# Altium PCB PCB1.PcbDoc (part 1 of 2)
Units mil, origin at the board's own origin, x right, y up, seen from the top; angles counter-clockwise.
Board outline 2755.91 x 2755.91 mil, 4 copper layers (Top Layer, Layer 1, Layer 2, Bottom Layer), stack 23.756 mil thick; 63 components, 137 nets, 462 pads, 284 vias.
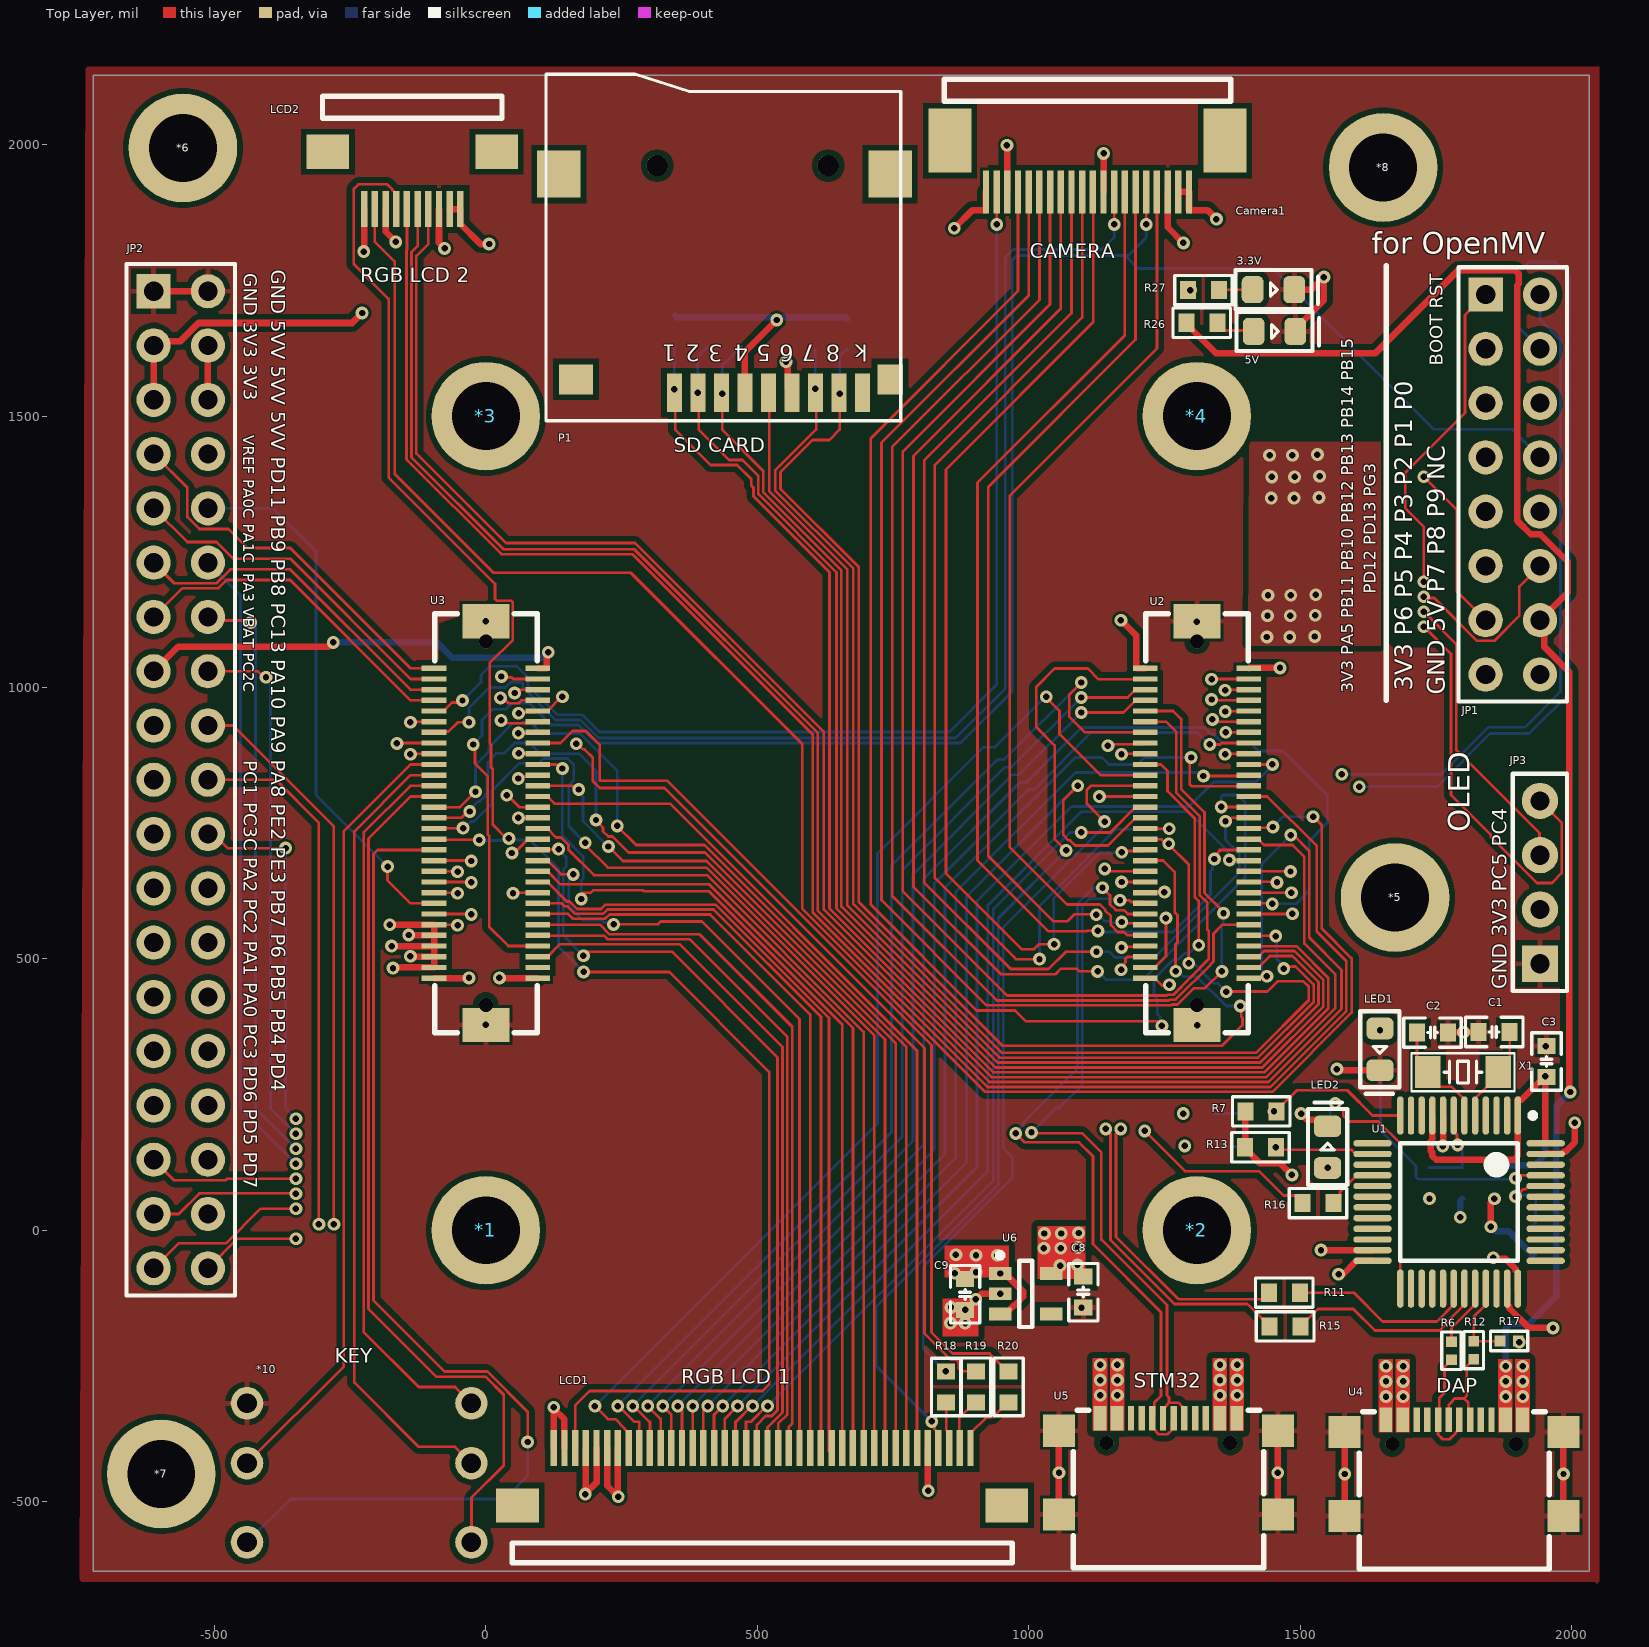
[diagram p0: Top Layer view]
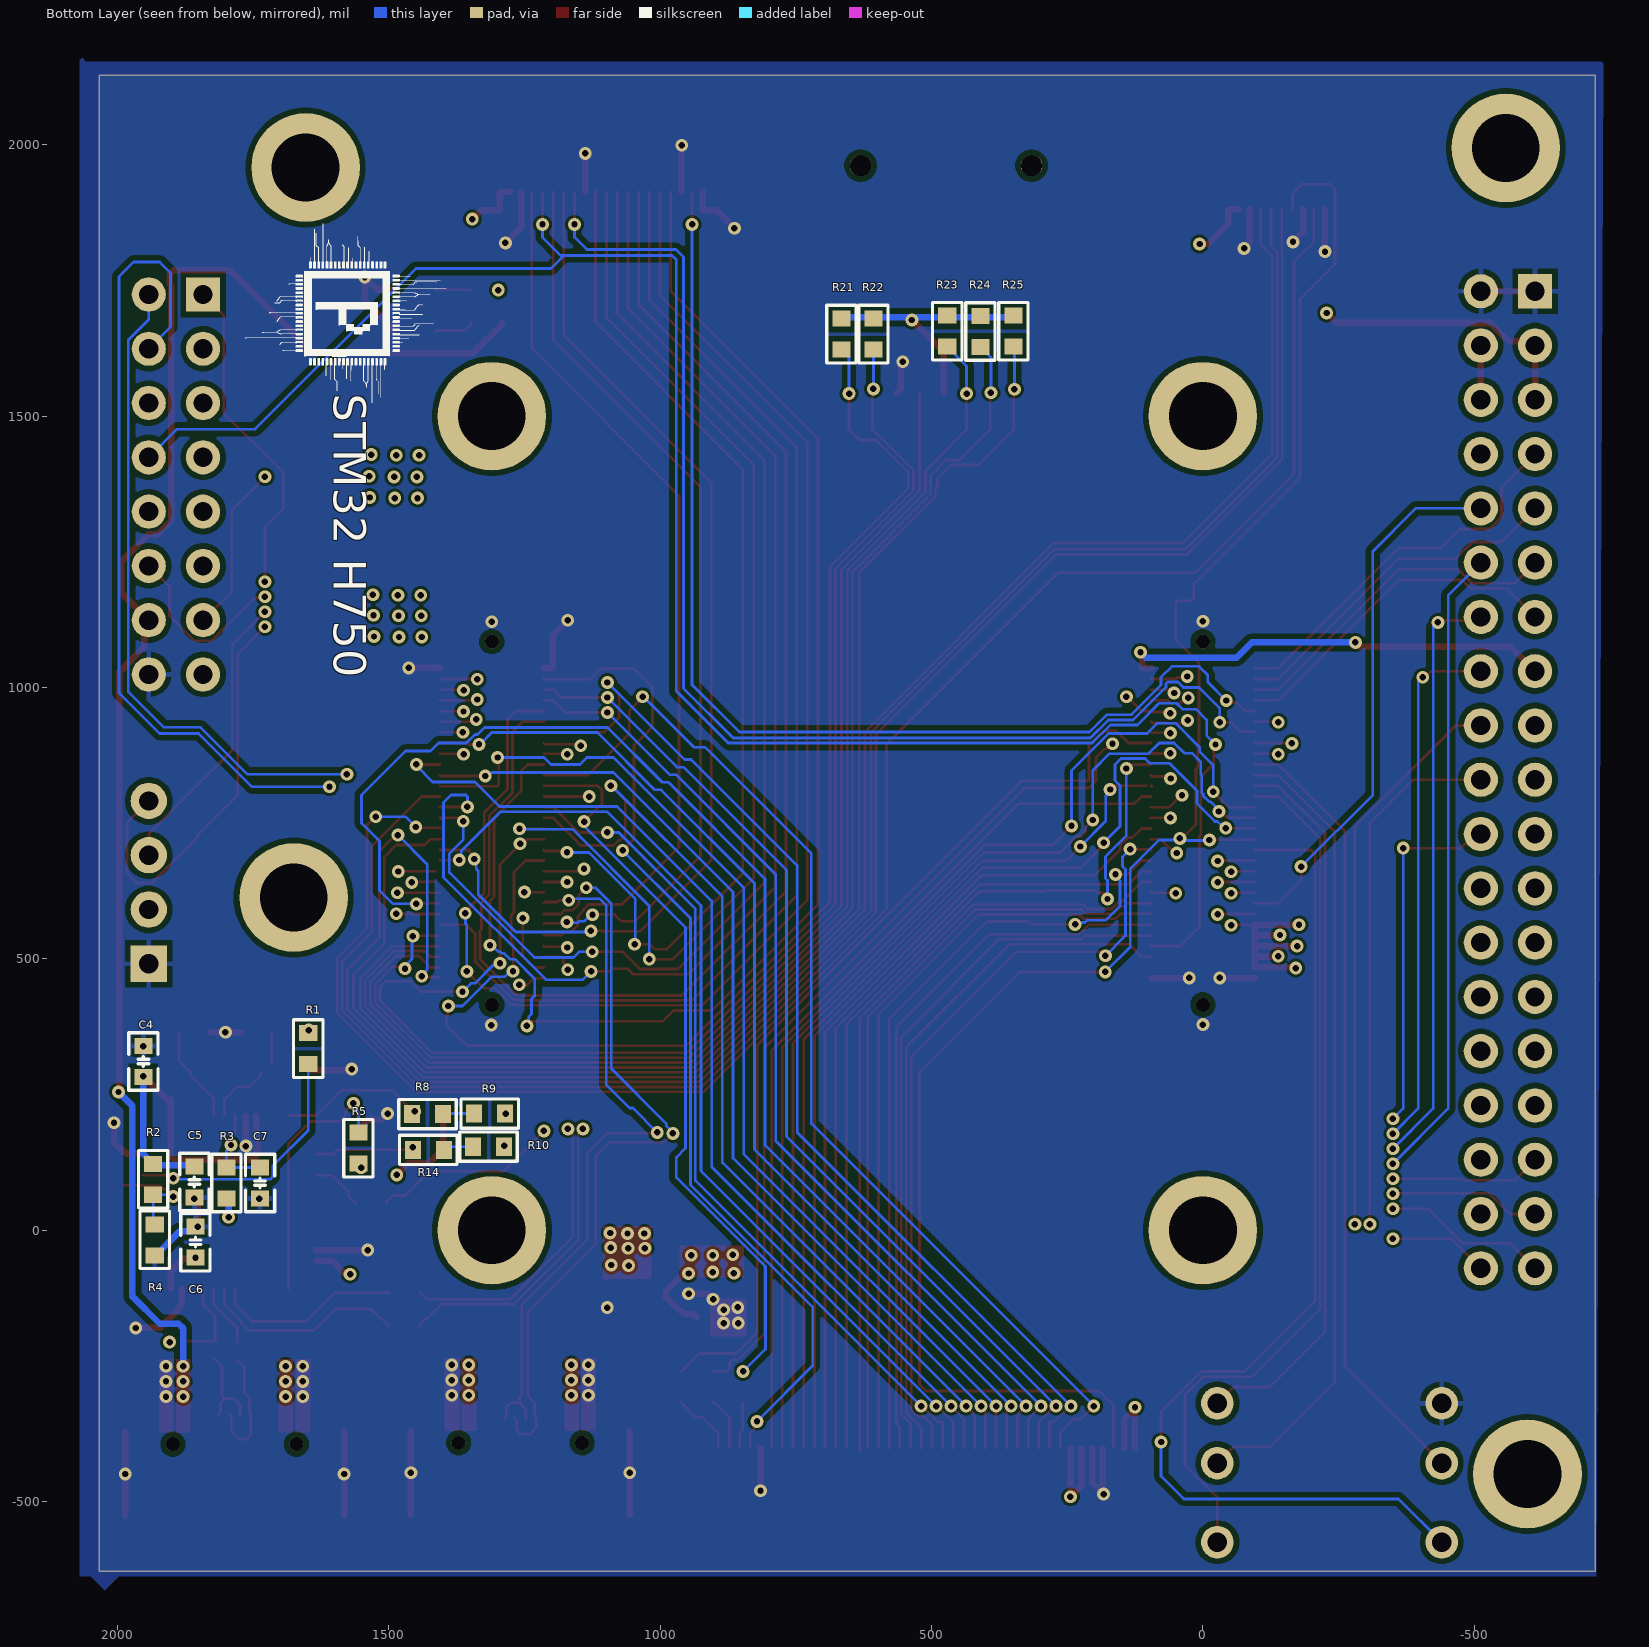
[diagram p1: Bottom Layer view, seen from below]
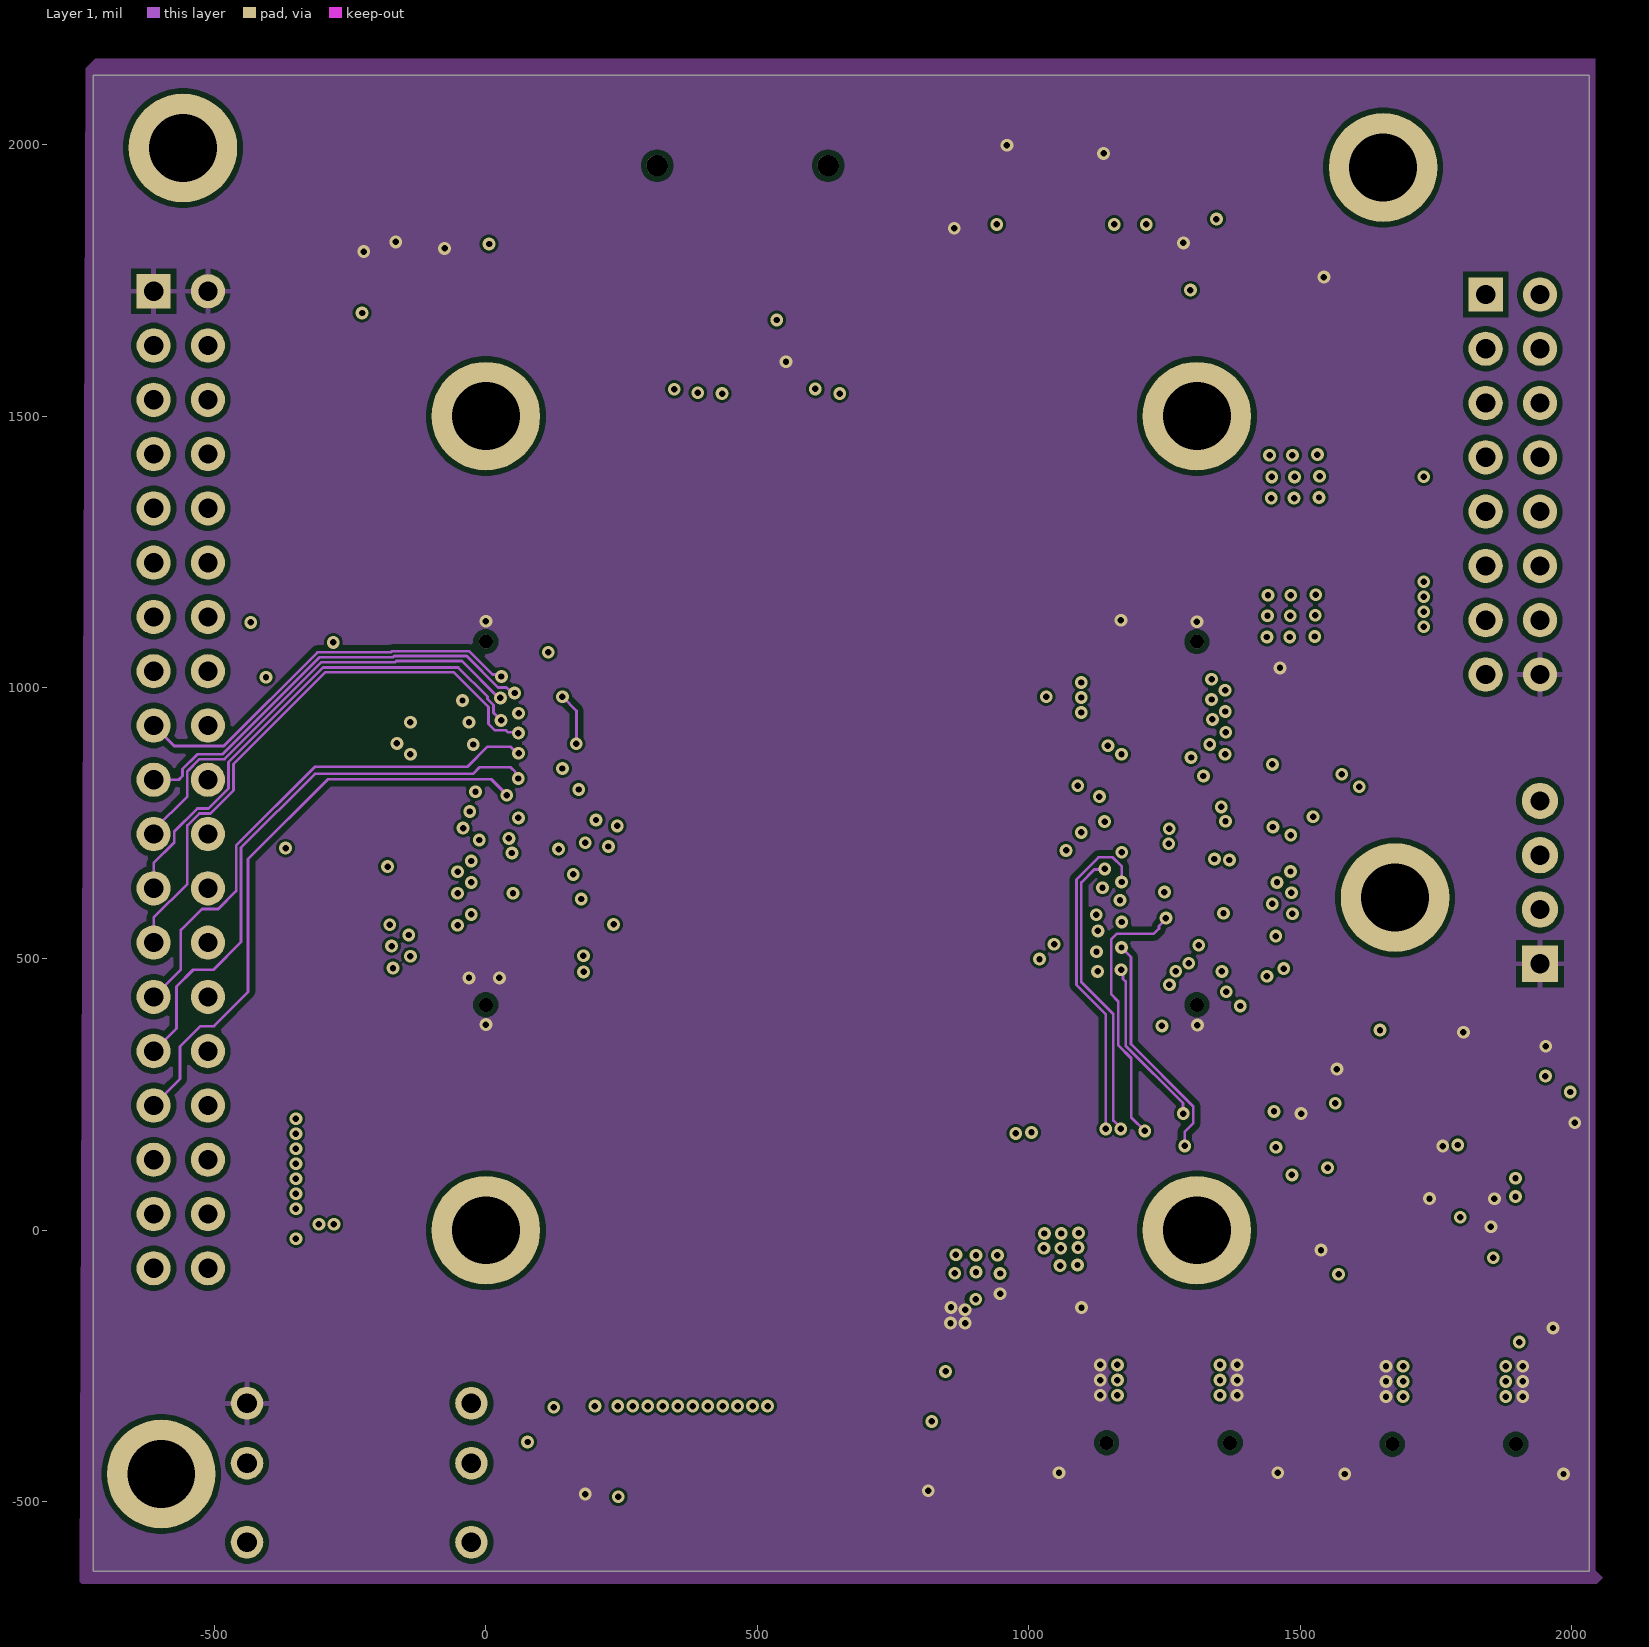
[diagram p2: Layer 1]
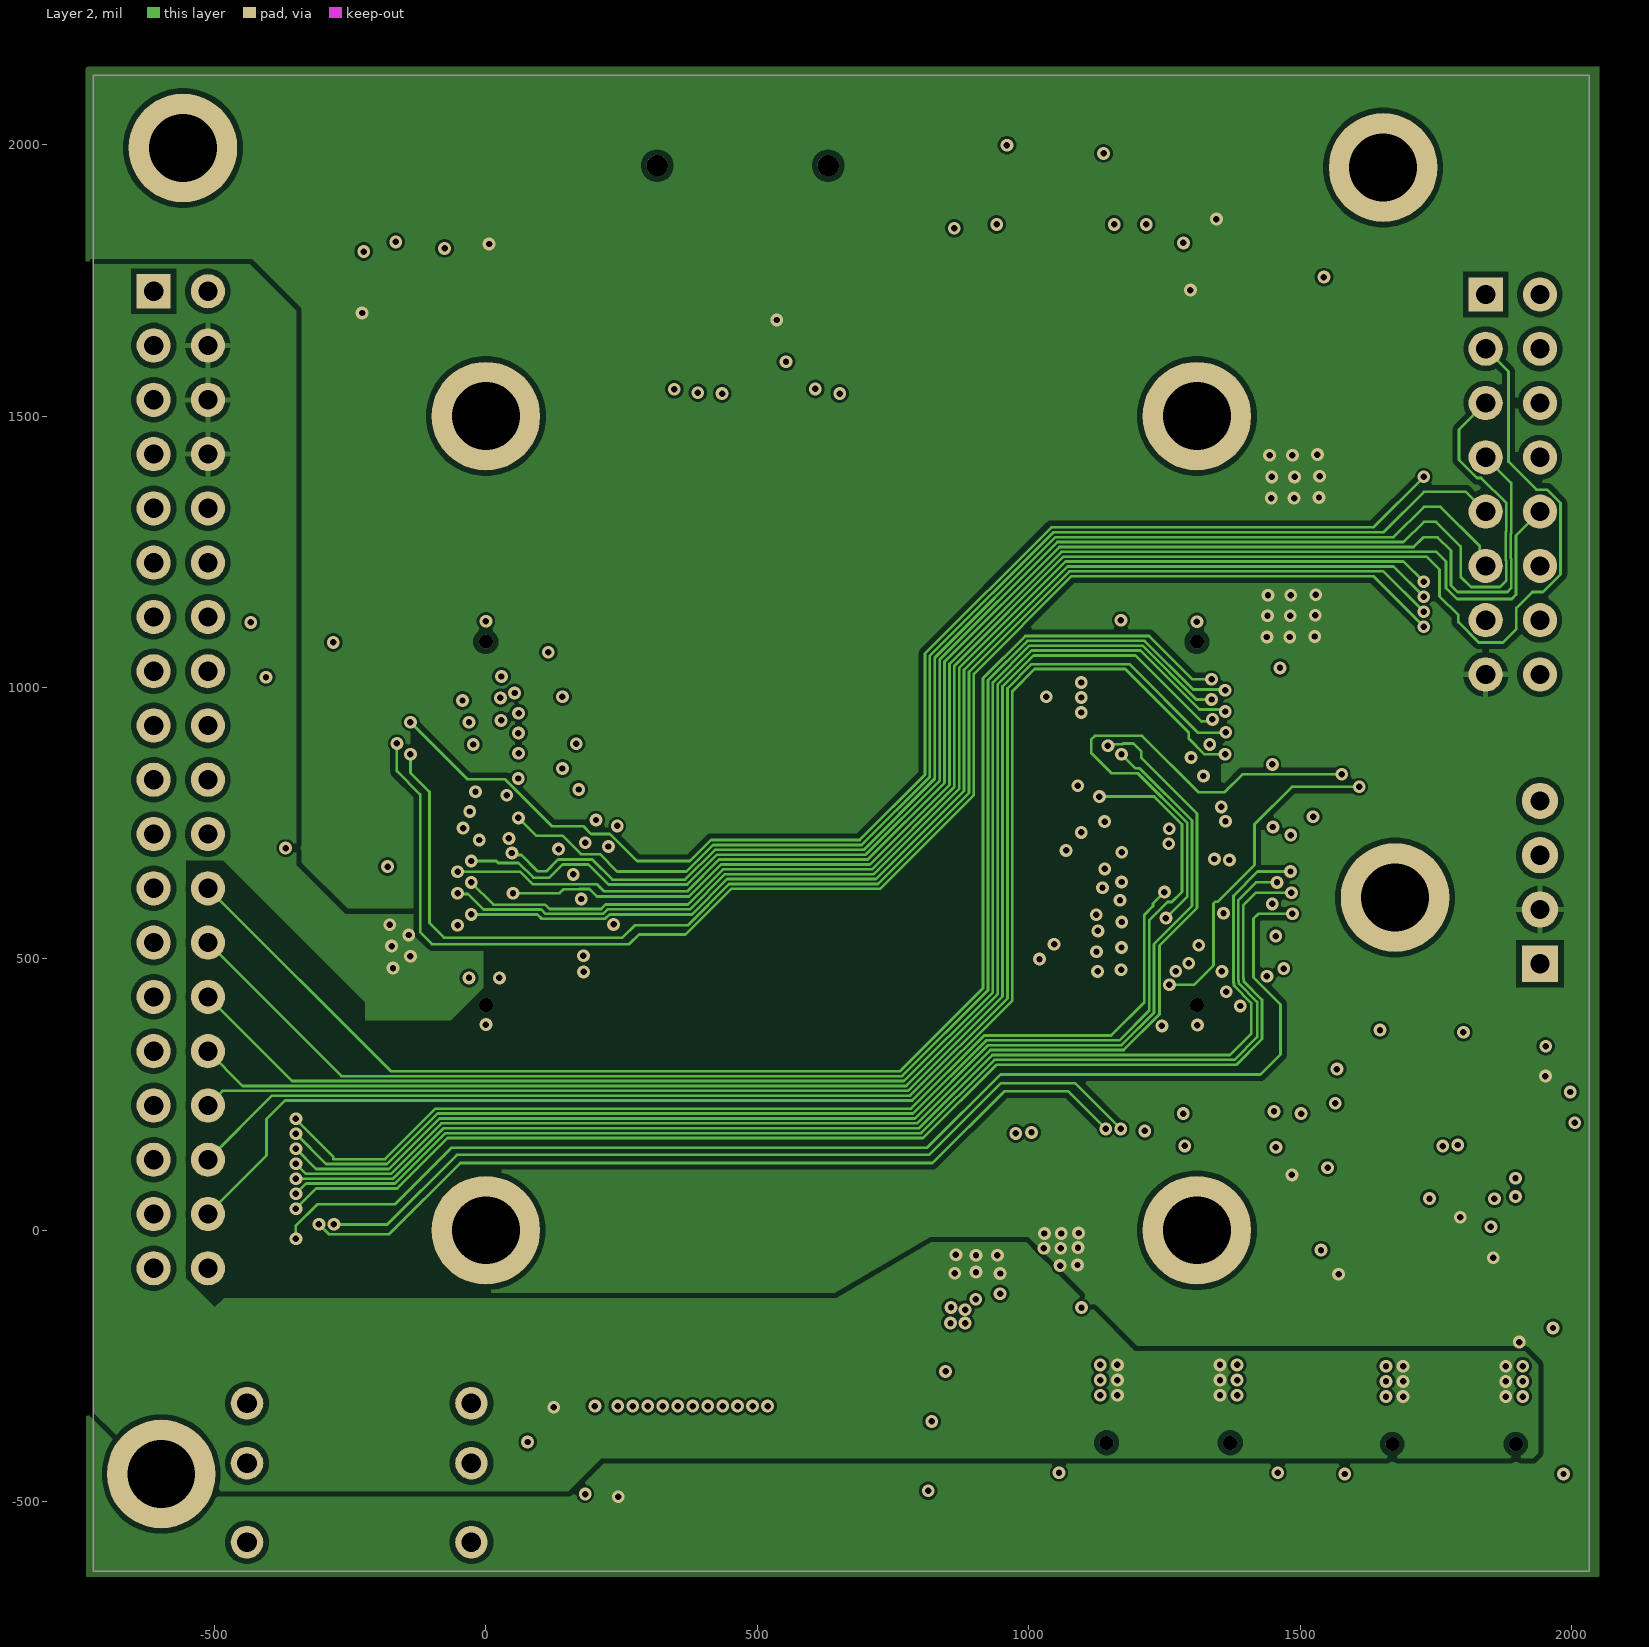
[diagram p3: Layer 2]

## Layer stack, top to bottom
Top Solder: solder mask 0.4, Solder Resist, Dk 3.5
Top Layer: signal copper 1.4
Dielectric 2: prepreg 2.8, PP-006, Dk 4.1
Layer 1: signal copper 1.378
Dielectric 1: dielectric 12.6, FR-4, Dk 4.8
Layer 2: signal copper 1.378
Dielectric 3: prepreg 2.8, PP-006, Dk 4.1
Bottom Layer: signal copper 1.4
Bottom Solder: solder mask 0.4, Solder Resist, Dk 3.5

## Board outline
-722.95,-627.95 -722.95,2127.95 2032.95,2127.95 2032.95,-627.95

## Design rules (kind name [scope] priority, off if disabled: settings)
Clearance via_inpoly [IsVia vs InPoly] p1: gap=5 ignorepadtopadclearanceinfootprint=FALSE
Clearance poly-poly [inpoly] p2: gap=10 ignorepadtopadclearanceinfootprint=FALSE
Clearance [All] p3: gap=4 ignorepadtopadclearanceinfootprint=FALSE
DiffPairsRouting [All] p1: maxlimit=5 minlimit=5 mostfreqgap=5 toplayer_minwidth=15 toplayer_maxwidth=15 toplayer_prefwidth=15 midlayer1_minwidth=15 midlayer1_maxwidth=15 midlayer1_prefwidth=15 midlayer2_minwidth=15 midlayer2_maxwidth=15 midlayer2_prefwidth=15 bottomlayer_minwidth=15 bottomlayer_maxwidth=15 bottomlayer_prefwidth=15 maxuncoupledlength=500
PlaneClearance [All] p1: clearance=7
PlaneConnect [All] p1: pad.planeconnectstyle=Relief pad.reliefexpansion=20 pad.reliefentries=4 pad.reliefconductorwidth=10 pad.reliefairgap=10 via.planeconnectstyle=Direct via.reliefexpansion=20 via.reliefentries=4 via.reliefconductorwidth=10 via.reliefairgap=10
PolygonConnect [All] p1: thpad.connectstyle=Relief thpad.reliefconductorwidth=10 thpad.reliefentries=4 thpad.polygonreliefangle="90 Angle" thpad.airgapwidth=10 smdpad.connectstyle=Relief smdpad.reliefconductorwidth=10 smdpad.reliefentries=4 smdpad.polygonreliefangle="90 Angle" smdpad.airgapwidth=5 via.connectstyle=Direct via.reliefconductorwidth=10 via.reliefentries=4 via.polygonreliefangle="90 Angle" via.airgapwidth=10
RoutingVias vias [All] p1: holewidth=11.81 width=23.62 viastyle="Through Hole" minholewidth=11.81 minwidth=23.62 maxholewidth=11.81 maxwidth=23.62
SilkToSolderMaskClearance [IsPad] p1: minsilkscreentomaskgap=2 clearancetoexposedcopper=TRUE
SolderMaskExpansion [All] p1: expansion=4 istentingtop=FALSE
Width power [InNetClass('power')] p1: maxlimit=12 minlimit=12 preferedwidth=12
Width signal [All] p2: maxlimit=12 minlimit=5 preferedwidth=5
26 further rules are at their usual default settings.

## Classes and differential pairs
net class power: +3.3 +5 GND VBAT-EXT VREF

## Components (designator, comment, footprint, x,y, rotation, side; value= is the part's Value field where it differs from the comment)
3.3V "绿色" LED0805_G 1451,1733 r0 top (schematic designator LED4)
5V "绿色" LED0805_G 1453,1656 r0 top (schematic designator LED3)
*1 "M3" "M3 125X200"#1 0,0 r0 top
*2 "M3" "M3 125X200"#2 1357,8 r0 top
*3 "M3" "M3 125X200"#3 -62,1504 r0 top
*4 "M3" "M3 125X200"#4 1394,1532 r0 top
*5 "M3" "M3 125X200"#1 1675,613 r90 top
*6 "M3" "M3 125X200"#1 -558,1994 r90 top
*7 "M3" "M3 125X200"#1 -598,-449 r90 top
*8 "M3" "M3 125X200"#1 1653,1958 r90 top
*10 "五向开关" "PCBComponent_1 - duplicate" -440,-318.76 r0 top
C1 "22PF" C0603_L 1857.61,365.25 r180 top
C2 "22PF" C0603_L 1744.15,364.25 r0 top
C3 "100NF" C0603_L 1954,311 r270 top
C4 "100NF" C0603_L 1952,311 r270 bottom
C5 "100NF" C0603_L 1858,89 r90 bottom
C6 "100NF" C0603_L 1856,-22 r270 bottom
C7 "100NF" C0603_L 1737,87 r90 bottom
C8 "1uf" C0603_L 1100.68,-114 r90 top
C9 "1uf" C0603_L 883,-118 r90 top
Camera1 "FPC 20P-0.5mm翻盖下接" FPC20P-0.5MM 1108.43,1960.34 r0 top
JP1 "Header 8X2" HDR2.54-LI-2x8P 1892,1374 r270 top
JP2 "Header 2X11" HDR2.54-LI-2x19P -562,830 r270 top
JP3 "HDR-1X4" HDR2.54-LI-4P 1942,641 r90 top
LCD1 "FPC 40P-0.5mm翻盖下接" FPC40P-0.5MM 509,-454 r180 top
LCD2 "FPC插座10P，翻盖下接，0.5mm间距" FPC10P-0.5MM -135.51,1934.24 r0 top
LED1 "绿色" LED0805_G 1647.23,333.28 r270 top
LED2 "绿色" LED0805_G 1550.78,153.31 r90 top
P1 "SD" "MICRO SD" 473.14,1961.39 r180 top
R1 "1k" R0603_L 1648.22,334.69 r90 bottom
R2 "0" R0603_L 1934,94 r90 bottom
R3 "10k" R0603_L 1799,87 r270 bottom
R4 "10k" R0603_L 1931,-17.54 r90 bottom
R5 "1k" R0603_L 1555.78,151.31 r270 bottom
R6 "22" R0402_L 1779,-222 r270 top
R7 "1K" R0603_L 1428.46,219 r0 top
R8 "22R" R0603_L 1428.46,214 r180 bottom
R9 "0" R0603_L 1314,215 r180 bottom
R10 "0" R0603_L 1316,154 r180 bottom
R11 "0" R0603_L 1471,-115 r180 top
R12 "22" R0402_L 1820,-221 r270 top
R13 "1K" R0603_L 1427,153 r0 top
R14 "22R" R0603_L 1427,148 r180 bottom
R15 "0" R0603_L 1472.54,-177 r180 top
R16 "0" R0603_L 1533,50 r180 top
R17 "1.5k" R0402_L 1885,-204 r180 top
R18 "1K" R0603_L 848,-288.54 r90 top
R19 "120" R0603_L 903,-288.46 r90 top
R20 "120" R0603_L 963,-288.46 r90 top
R21 "10k" R0603_L 666,1651 r270 bottom
R22 "10k" R0603_L 607,1651 r270 bottom
R23 "10k" R0603_L 471,1656.46 r270 bottom
R24 "10k" R0603_L 410,1656 r270 bottom
R25 "10k" R0603_L 349,1656.46 r270 bottom
R26 "1k" R0603_L 1319,1672 r0 top
R27 "1k" R0603_L 1322,1732 r0 top
U1 "STM32F103C8T6" LQFP48_N 1793,52 r270 top
U2 "BTB0.5-60F-2.0G" CONN-SMD_60P-P0.50_BTB0.5-60F-2.0G 1310,750 r90 top locked
U3 "BTB0.5-60F-2.0G" CONN-SMD_60P-P0.50_BTB0.5-60F-2.0G 0,750 r90 top locked
U4 "ZX-TYPEC-WTM1628" USB-C-SMD_ZX-TYPEC-WTM1628 1783.77,-482.55 r0 top
U5 "ZX-TYPEC-WTM1628" USB-C-SMD_ZX-TYPEC-WTM1628 1257.43,-480.19 r0 top
U6 "ME6211C33M5G" SOT-23-5 994.68,-117 r0 top
X1 "8MHz" XTAL-3215-2P 1800.15,291.25 r180 top

## Footprints (in the part's own frame and the unit in brackets; to place one, negate y for a bottom-side part, rotate by r counter-clockwise, add the part's x,y. Pads: shape width x height; smd on the part's side, far side on the other; paste and mask are expansions set on the pad)
C0603_L [mm]
  rect 0.75x0.85 smd: 1(-0.725,0) 2(0.725,0)
  silkscreen extent -1.35,-0.69 1.35,0.69, body extent -0.8,-0.4 0.8,0.4, height 0.8
CONN-SMD_60P-P0.50_BTB0.5-60F-2.0G [mm]
  rect 0.25x1.15 smd paste+0 mask+0.051: 1(-7.25,2.425) 2(-7.25,-2.425) 3(-6.75,2.425) 4(-6.75,-2.425) 5(-6.25,2.425) 6(-6.25,-2.425) 7(-5.75,2.425) 8(-5.75,-2.425) 9(-5.25,2.425) 10(-5.25,-2.425) 11(-4.75,2.425) 12(-4.75,-2.425) 13(-4.25,2.425) 14(-4.25,-2.425) 15(-3.75,2.425) 16(-3.75,-2.425) 17(-3.25,2.425) 18(-3.25,-2.425) 19(-2.75,2.425) 20(-2.75,-2.425) 21(-2.25,2.425) 22(-2.25,-2.425) 23(-1.75,2.425) 24(-1.75,-2.425) 25(-1.25,2.425) 26(-1.25,-2.425) 27(-0.75,2.425) 28(-0.75,-2.425) 29(-0.25,2.425) 30(-0.25,-2.425) 31(0.25,2.425) 32(0.25,-2.425) 33(0.75,2.425) 34(0.75,-2.425) 35(1.25,2.425) 36(1.25,-2.425) 37(1.75,2.425) 38(1.75,-2.425) 39(2.25,2.425) 40(2.25,-2.425) 41(2.75,2.425) 42(2.75,-2.425) 43(3.25,2.425) 44(3.25,-2.425) 45(3.75,2.425) 46(3.75,-2.425) 47(4.25,2.425) 48(4.25,-2.425) 49(4.75,2.425) 50(4.75,-2.425) 51(5.25,2.425) 52(5.25,-2.425) 53(5.75,2.425) 54(5.75,-2.425) 55(6.25,2.425) 56(6.25,-2.425) 57(6.75,2.425) 58(6.75,-2.425) 59(7.25,2.425) 60(7.25,-2.425)
  rect 1.6x2.2 smd paste+0 mask+0.051: 61(-9.45,0) 62(9.45,0)
  round 0.65 hole 0.65 unplated paste+0: ""(-8.5,0) ""(8.5,0)
  silkscreen extent -9.8,-2.4 9.8,2.4
FPC10P-0.5MM [mm]
  rect 2x1.6 smd: 0(-3.95,1.34) 0(3.95,1.34)
  rect 0.3x1.7 smd: 1(2.25,-1.34) 2(1.75,-1.34) 3(1.25,-1.34) 4(0.75,-1.34) 5(0.25,-1.34) 6(-0.25,-1.34) 7(-0.75,-1.34) 8(-1.25,-1.34) 9(-1.75,-1.34) 10(-2.25,-1.34)
  silkscreen extent -4.2,2.91 4.2,3.93, body extent -4.5,-1.6 4.5,4.41, height 2.1
FPC20P-0.5MM [mm]
  rect 2x3 smd: 0(-6.436,1.202) 0(6.436,1.202)
  rect 0.3x2 smd: 1(4.75,-1.202) 2(4.25,-1.202) 3(3.75,-1.202) 4(3.25,-1.202) 5(2.75,-1.202) 6(2.25,-1.202) 7(1.75,-1.202) 8(1.25,-1.202) 9(0.75,-1.202) 10(0.25,-1.202) 11(-0.25,-1.202) 12(-0.75,-1.202) 13(-1.25,-1.202) 14(-1.75,-1.202) 15(-2.25,-1.202) 16(-2.75,-1.202) 17(-3.25,-1.202) 18(-3.75,-1.202) 19(-4.25,-1.202) 20(-4.75,-1.202)
  silkscreen extent -6.7,3.05 6.7,4.07, body extent -7.7,-1.5 7.7,4, height 2.1
FPC40P-0.5MM [mm]
  rect 2x1.6 smd: 0(-11.45,1.34) 0(11.45,1.34)
  rect 0.3x1.7 smd: 1(9.75,-1.34) 2(9.25,-1.34) 3(8.75,-1.34) 4(8.25,-1.34) 5(7.75,-1.34) 6(7.25,-1.34) 7(6.75,-1.34) 8(6.25,-1.34) 9(5.75,-1.34) 10(5.25,-1.34) 11(4.75,-1.34) 12(4.25,-1.34) 13(3.75,-1.34) 14(3.25,-1.34) 15(2.75,-1.34) 16(2.25,-1.34) 17(1.75,-1.34) 18(1.25,-1.34) 19(0.75,-1.34) 20(0.25,-1.34) 21(-0.25,-1.34) 22(-0.75,-1.34) 23(-1.25,-1.34) 24(-1.75,-1.34) 25(-2.25,-1.34) 26(-2.75,-1.34) 27(-3.25,-1.34) 28(-3.75,-1.34) 29(-4.25,-1.34) 30(-4.75,-1.34) 31(-5.25,-1.34) 32(-5.75,-1.34) 33(-6.25,-1.34) 34(-6.75,-1.34) 35(-7.25,-1.34) 36(-7.75,-1.34) 37(-8.25,-1.34) 38(-8.75,-1.34) 39(-9.25,-1.34) 40(-9.75,-1.34)
  silkscreen extent -11.7,3.1 11.7,4.03, body extent -12.2,-1.79 12.2,4.51, height 2
HDR2.54-LI-2x8P [mm]
  rect 1.6x1.6 hole 0.9: 1(-8.89,-1.27)
  round 1.6 hole 0.9: 2(-8.89,1.27) 3(-6.35,-1.27) 4(-6.35,1.27) 5(-3.81,-1.27) 6(-3.81,1.27) 7(-1.27,-1.27) 8(-1.27,1.27) 9(1.27,-1.27) 10(1.27,1.27) 11(3.81,-1.27) 12(3.81,1.27) 13(6.35,-1.27) 14(6.35,1.27) 15(8.89,-1.27) 16(8.89,1.27)
  silkscreen extent -10.16,-2.54 10.16,2.54, body extent -10.16,-2.54 10.16,2.54, height 8.5
HDR2.54-LI-2x19P [mm]
  rect 1.6x1.6 hole 0.9: 1(-22.86,-1.27)
  round 1.6 hole 0.9: 2(-22.86,1.27) 3(-20.32,-1.27) 4(-20.32,1.27) 5(-17.78,-1.27) 6(-17.78,1.27) 7(-15.24,-1.27) 8(-15.24,1.27) 9(-12.7,-1.27) 10(-12.7,1.27) 11(-10.16,-1.27) 12(-10.16,1.27) 13(-7.62,-1.27) 14(-7.62,1.27) 15(-5.08,-1.27) 16(-5.08,1.27) 17(-2.54,-1.27) 18(-2.54,1.27) 19(0,-1.27) 20(0,1.27) 21(2.54,-1.27) 22(2.54,1.27) 23(5.08,-1.27) 24(5.08,1.27) 25(7.62,-1.27) 26(7.62,1.27) 27(10.16,-1.27) 28(10.16,1.27) 29(12.7,-1.27) 30(12.7,1.27) 31(15.24,-1.27) 32(15.24,1.27) 33(17.78,-1.27) 34(17.78,1.27) 35(20.32,-1.27) 36(20.32,1.27) 37(22.86,-1.27) 38(22.86,1.27)
  silkscreen extent -24.13,-2.54 24.13,2.54, body extent -24.13,-2.54 24.13,2.54, height 8.5
HDR2.54-LI-4P [mm]
  rect 1.7x1.7 hole 0.9: 1(-3.81,0)
  round 1.7 hole 0.9: 2(-1.27,0) 3(1.27,0) 4(3.81,0)
  silkscreen extent -5.08,-1.27 5.08,1.27, body extent -5.08,-1.27 5.08,1.27, height 2.54
LED0805_G [mil]
  rrect50% 40x50 smd: 1(-38.4,0) 2(38.4,0)
  silkscreen extent -70,-36 82,36, body extent -39,-25 39,25, height 32
LQFP48_N [mm]
  oval 1.8x0.3 smd: 1(-4.05,2.75) 2(-4.05,2.25) 3(-4.05,1.75) 4(-4.05,1.25) 5(-4.05,0.75) 6(-4.05,0.25) 7(-4.05,-0.25) 8(-4.05,-0.75) 9(-4.05,-1.25) 10(-4.05,-1.75) 11(-4.05,-2.25) 12(-4.05,-2.75) 25(4.05,-2.75) 26(4.05,-2.25) 27(4.05,-1.75) 28(4.05,-1.25) 29(4.05,-0.75) 30(4.05,-0.25) 31(4.05,0.25) 32(4.05,0.75) 33(4.05,1.25) 34(4.05,1.75) 35(4.05,2.25) 36(4.05,2.75)
  oval 0.3x1.8 smd: 13(-2.75,-4.05) 14(-2.25,-4.05) 15(-1.75,-4.05) 16(-1.25,-4.05) 17(-0.75,-4.05) 18(-0.25,-4.05) 19(0.25,-4.05) 20(0.75,-4.05) 21(1.25,-4.05) 22(1.75,-4.05) 23(2.25,-4.05) 24(2.75,-4.05) 37(2.75,4.05) 38(2.25,4.05) 39(1.75,4.05) 40(1.25,4.05) 41(0.75,4.05) 42(0.25,4.05) 43(-0.25,4.05) 44(-0.75,4.05) 45(-1.25,4.05) 46(-1.75,4.05) 47(-2.25,4.05) 48(-2.75,4.05)
  silkscreen extent -4.17,-2.75 2.75,3.58, body extent -4.5,-4.5 4.5,4.5, height 1.45
"M3 125X200"#1 [mil]
  round 200 hole 125: 1(0,0)
"M3 125X200"#2 [mil]
  round 200 hole 125: 1(-47,-8)
"M3 125X200"#3 [mil]
  round 200 hole 125: 1(62,-4)
"M3 125X200"#4 [mil]
  round 200 hole 125: 1(-84,-32)
"MICRO SD" [mm]
  round 1 hole 1 unplated: 0(-4,0) 0(4,0)
  rect 0.7x1.8 smd: 1(3.2,10.627) 2(2.1,10.627) 3(1,10.627) 4(-0.1,10.627) 5(-1.2,10.627) 6(-2.3,10.627) 7(-3.4,10.627) 8(-4.5,10.627) 9(-5.6,10.627)
  rect 2.032x2.2 smd: 10(-6.9,0.4) 10(8.6,0.4)
  rect 1.2x1.4 smd: 10(-6.9,10)
  rect 1.6x1.4 smd: 10(7.8,10)
  silkscreen extent -7.4,-4.28 9.2,11.94, body extent -7.05,-3.87 8.95,11.38, height 2
"PCBComponent_1 - duplicate" [mil]
  round 60 hole 36: 1(0,0) 2(0,-110.24) 3(0,-255.91) 4(413.39,0) 5(413.39,-110.24) 6(413.39,-255.91)
R0402_L [mm]
  rect 0.5x0.5 smd: 1(-0.425,0) 2(0.425,0)
  silkscreen extent -0.88,-0.46 0.87,0.46, body extent -0.5,-0.25 0.5,0.25, height 0.3
R0603_L [mm]
  rect 0.75x0.85 smd: 1(-0.725,0) 2(0.725,0)
  silkscreen extent -1.35,-0.69 1.35,0.69, body extent -0.8,-0.4 0.8,0.4, height 0.4
SOT-23-5 [mm]
  rect 1.05x0.6 smd: 1(-1.2,0.95) 2(-1.2,0) 3(-1.2,-0.95) 4(1.2,-0.95) 5(1.2,0.95)
  silkscreen extent -1.32,-1.55 0.3,1.92, body extent -1.4,-1.5 1.4,1.5, height 1.15
USB-C-SMD_ZX-TYPEC-WTM1628 [mm]
  rect 1.5x1.5 smd paste+0 mask+0.051: 13(-5.12,2.817) 14(-5.12,-1.113) 15(5.12,2.817) 16(5.12,-1.113)
  rect 0.6x1.15 smd paste+0 mask+0.051: A1B12(-3.2,3.392) A4B9(-2.4,3.392) B1A12(3.2,3.392) B4A9(2.4,3.392)
  rect 0.3x1.15 smd paste+0 mask+0.051: A5(-1.25,3.392) A6(-0.25,3.392) A7(0.25,3.392) A8(1.25,3.392) B5(1.75,3.392) B6(0.75,3.392) B7(-0.75,3.392) B8(-1.75,3.392)
  round 0.65 hole 0.65 unplated paste+0: ""(-2.89,2.249) ""(2.89,2.249)
  silkscreen extent -4.44,-3.59 4.45,3.77
XTAL-3215-2P [mm]
  rect 1.2x1.5 smd: 1(-1.65,0) 2(1.65,0)
  silkscreen extent -2.41,-0.89 2.41,0.89, body extent -1.6,-0.75 1.6,0.75, height 0.61

## Part data
3.3V 5V LED1 LED2: library part LED, "贴片LED"
*1 *2 *3 *4 *5 *6 *7 *8: "铜柱孔"
C1 C2 C3 C4 C5 C6 C7 C8 C9: library part C, "贴片电容/MLCC电容"
Camera1: library part FK_Camera
JP1: "8*2P接插件"
JP2: library part "Header 19X2", "19*2P接插件"
JP3: library part "Header 4", "4P接插件"
LCD1: library part MY-RGB
LCD2: library part LCD-SPI
P1: library part "Micro SD_SD", "自弹式TF卡座"
R1 R2 R3 R4 R5 R6 R7 R8 R9 R10 R11 R12 R13 R14 R15 R16 R17 R18 R19 R20 R21 R22 R23 R24 R25 R26 R27: library part R, "贴片电阻"
U1: "STM32 ARM-based 32-bit MCU Performance Line with 64 kB Flash, 20 kB Internal RAM, -40 to +85癈 Temperature, 48-Pin LQFP, Tray"
U6: library part ME6211C33, "LDO 3.3V/0.5A"
X1: library part XTAL-2P, "2脚无源晶振(谐振器）"

## Via types
v1: diameter 23.62, hole 11.81, Top Layer to Bottom Layer, tented both sides, 284 vias

## Nets (pads, with @x,y where several pads share a name; then routed paths per layer and width w, separated by ;. In a path a pad name is that pad's centre, name@x,y a point inside that pad or via, vN(x,y) a via of type N, cw(c..) or ccw(c..) an arc to the next point about the centre after c; other vN are vias at no path point)
+3.3: C3.2 C4.2 C5.2 C6.2 C8.2 Camera1.1 Camera1.2 JP1.15 JP2.3 JP2.5 JP3.2 LCD1.6 LCD1.7 LCD2.1 LCD2.2 P1.4 R2.2 R3.2 R7.1 R13.1 R17.1 R21.1 R22.1 R23.1 R24.1 R25.1 R27.1 U1.1 U1.9 U1.24 U1.36 U1.48 U6.5 | length 2624.1
  Top Layer w12: JP2.5@-612,1530 JP2.3@-612,1630 -603.82,1638.18 -562.5,1638.18 -529.19,1671.5 -246.5,1671.5 v1(-228,1690) ; LCD2.2@-66.61,1881.49 LCD2.1@-46.93,1881.49 -46.93,1854.12 -9.81,1817 v1(6,1817) ; LCD1.6@223.57,-401.24 223.57,-470.57 v1@243.25,-490.25 ; LCD1.7@243.25,-401.24 v1@243.25,-490.25 ; v1(244,-491) v1@243.25,-490.25 ; P1.4@477.08,1543 477.08,1618.08 v1(536,1677) ; U6.5@1041.93,-79.6 1044.86,-82.53 1097.76,-82.53 C8.2@1100.68,-85.46 ; Camera1.2@1275.74,1913 Camera1.1@1295.43,1913 1295.43,1879.72 1295.52,1879.63 1329.37,1879.63 v1(1346,1863) ; R27.1@1293.46,1732 v1(1298,1732) ; R7.1@1399.91,219 1399.19,218.27 1399.19,153.73 R13.1@1398.46,153 1398.46,151.03 1426.24,123.25 1463.75,123.25 v1(1485,102) ; v1(1571,-81) 1579.48,-81 1604.21,-56.27 U1.24@1633.55,-56.27 ; U1.9@1743.79,211.45 1743.79,166.63 1741.19,164.03 1741.19,145.97 1743.79,143.37 1743.79,137.03 1750.82,130 1894.24,130 1901.27,137.03 U1.1@1901.27,211.45 1901.27,240.79 1901.36,240.88 1908.46,240.88 1950.03,282.46 C3.2@1952,282.46 ; v1(1856,-50.54) 1858.22,-52.77 1878.92,-52.77 1897.49,-71.33 1897.49,-74.33 1901.27,-78.11 U1.36@1901.27,-107.45 ; R17.1@1901.73,-204 v1(1903.73,-206) ; v1(1952,284) C3.2@1952,282.46 ; U1.48@1952.45,160.27 1952.09,160.27 1952,160.36 C3.2@1952,282.46
  Bottom Layer w12: R25.1@349,1685 351.73,1682.27 663.27,1682.27 R21.1@666,1679.54 ; v1(1795,24) 1795,54.46 R3.2@1799,58.46 ; C5.2@1858,117.54 1860.5,120.04 1933.47,120.04 1944.73,131.31 1944.73,133.28 1952,140.54 C4.2@1952,282.46 v1(1952,284)
  other v1: 1058,-65 1090,-64 1028,-33 1059,-33 1091,-32 1029,-6 1060,-6 1092,-5 1439,1093 1481,1093 1527,1094 1440,1132 1482,1132 1528,1133 1441,1170 1483,1170 1529,1171 1447,1349 1489,1349 1535,1350 1448,1388 1490,1388 1536,1389 1444,1428 1486,1428 1532,1429
+5: C9.2 JP1.14 JP2.4 JP2.6 JP2.8 LCD1.1 LCD1.2 R26.1 U3.3 U3.5 U3.7 U3.9 U3.11 U4.A4B9 U4.B4A9 U5.A4B9 U5.B4A9 U6.1 U6.3 | length 3776.6
  Top Layer w5: U3.11@-95.47,562.98 v1@-53.04,562.98
  Top Layer w12: JP2.6@-512,1530 JP2.4@-512,1630 ; v1(-177,563) U3.11@-95.47,562.98 U3.9@-95.47,543.3 ; v1(-173.61,523.61) U3.7@-95.47,523.61 ; v1(-171,483) -169.76,484.24 U3.3@-95.47,484.24 U3.5@-95.47,503.93 ; v1(-142,544) -141.3,543.3 U3.9@-95.47,543.3 ; v1(-139,505) -137.93,503.93 U3.5@-95.47,503.93 ; v1(125,-326) 125,-328.51 v1@125.14,-328.65 ; LCD1.1@125.14,-401.24 v1@125.14,-328.65 ; LCD1.2@144.83,-401.24 144.83,-348.33 v1@125.14,-328.65 ; v1@904.55,-57.7 925.54,-57.7 v1(947.44,-79.6) 956.3,-79.6 971.89,-95.19 972.25,-95.19 989.71,-112.65 989.71,-122.59 973.5,-138.81 971.89,-138.81 956.3,-154.4 U6.3@947.44,-154.4 938.58,-154.4 U6.3@932.77,-160.21 ; R26.1@1290.46,1672 1290.46,1670.03 1344.49,1616 1639,1616 1792,1769 1895.97,1769 1903,1761.97 1903,1743.68 1900.5,1741.19 1900.5,1306.81 1925.19,1282.12 1942.56,1282.12 1993,1231.68 1993,1175 JP1.14@1942,1124 1950.18,1115.82 1950.18,1074.5 1996,1028.68 1996,253 v1(1997.72,254.72) ; U3.5@-95.47,503.93 U3.7@-95.47,523.61 ; U3.7@-95.47,523.61 U3.9@-95.47,543.3
  Bottom Layer w12: v1(1878.82,-250.36) 1878.82,-180.18 1887,-172 1922,-172 1972,-122 1972,229 v1(1997.72,254.72)
  other v1: 1689.85,-306.36 1878.82,-306.36 1163.5,-304 1352.47,-304 1689.85,-278.36 1878.82,-278.36 1163.5,-276 1352.47,-276 1689.85,-250.36 1163.5,-248 1352.47,-248 864,-79 903,-77 903,-46 942.52,-46.13 866,-45 -52,561.94
BOOT0: JP1.4 U2.1 | length 2160.2
  Top Layer w5: U2.1@1214.53,464.56 1232.25,464.56 1245.84,450.97 1258.02,450.97 v1(1259.31,452.26)
  Layer 2 w5: v1(1259.31,452.26) 1304.82,452.26 1340.62,488.06 1340.62,602.18 1343.55,605.11 1348.11,605.11 1416,673 1416,748 1485,817 v1(1609,817)
  Bottom Layer w5: v1(1609,817) 1752,817 1850.13,915.13 1922.13,915.13 1997,990 1997,1757 1970,1784 1922,1784 1902,1764 1902,1664 JP1.4@1942,1624
"CAM_PWDN / PG7": Camera1.6 U2.11 | length 1688.8
  Top Layer w5: v1(1124.52,581.28) 1123.81,582 1083.98,582 1071.14,569.16 1046.16,569.16 925.63,689.69 925.63,1369.4 1197,1640.77 Camera1.6@1197,1913 ; v1(1171.64,567.93) 1174.17,565.4 1212.11,565.4 U2.11@1214.53,562.98
  Bottom Layer w5: v1(1124.52,581.28) 1128.35,581.28 1140.47,569.16 1149.83,569.16 1152.33,566.66 1170.37,566.66 v1(1171.64,567.93)
DAP_BOOT0: R2.1 R4.2 U1.44 | length 192.7
  Top Layer w5: v1(1897,62) 1910.65,75.65 1915.21,75.65 1921.08,81.53 U1.44@1952.45,81.53 1953.75,82.83 U1.44@1986.95,82.83
  Bottom Layer w5: v1(1897,62) 1900.46,65.46 R2.1@1934,65.46 1934,14 R4.2@1931,11
DAP_DM: R6.1 U1.32 | length 115.8
  Top Layer w5: R6.1@1779,-205.27 1779,-180.27 1822.53,-136.74 U1.32@1822.53,-107.45
DAP_DP: R12.1 R17.2 U1.33 | length 154.4
  Top Layer w5: U1.33@1842.21,-107.45 1842.21,-136.98 1820,-159.19 R12.1@1820,-204.27 1868,-204.27 R17.2@1868.27,-204
DAP_LED1: R5.1 U1.25 | length 501.7
  Top Layer w5: v1(1565,234) 1579.43,219.57 1579.43,211.4 1590.29,200.53 1643.92,200.53 1684.73,159.72 U1.25@1684.73,-107.45
  Bottom Layer w5: R5.1@1541.54,194.09 1541.54,192.12 1553.81,179.85 R5.1@1555.78,179.85 1555.78,219.74 1565,228.96 v1(1565,234)
DAP_LED2: R1.1 U1.45 | length 478.3
  Top Layer w5: v1(1897,95.73) 1902.04,95.73 1907.52,101.21 U1.45@1952.45,101.21
  Bottom Layer w5: R1.1@1648.22,306.15 1648.22,184.23 1713.77,118.69 1713.77,98.09 1717.58,94.28 1738.18,94.28 1895.55,94.28 v1(1897,95.73)
DAP_nRST: C7.2 R3.1 U1.7 | length 166.1
  Top Layer w5: U1.7@1783.16,211.45 1783.16,181.69 1789,175.85 1789,157.12 v1(1790.54,157.12)
  Bottom Layer w5: C7.2@1737,115.54 R3.1@1799,115.54 1799,147 1789.71,156.29 v1(1790.54,157.12)
DAP_RST: R16.1 U1.16 | length 98.3
  Top Layer w5: R16.1@1561.54,50 1573.81,62.26 1573.81,71 1604.02,101.21 U1.16@1633.55,101.21
DAP_RXD: R15.1 U1.31 | length 383.2
  Top Layer w5: R15.1@1501.09,-177 1501.09,-175.03 1513.35,-162.77 1515.32,-162.77 1533.09,-145 1598,-145 1637.71,-184.71 1757.29,-184.71 1772.04,-169.96 1772.04,-167.78 1802.84,-136.98 U1.31@1802.84,-107.45
DAP_TCK/CK: R13.2 R14.1 U1.14 | length 187.7
  Top Layer w5: R13.2@1455.16,145.87 1455.16,150.87 1457.72,148.31 1594.45,148.31 1602.18,140.58 U1.14@1633.55,140.58
  other v1: 1455.54,153
DAP_TMS/IO: R7.2 R8.1 U1.12 | length 268.2
  Top Layer w5: v1(1452,219) 1455.03,219 1494.03,258 1587,258 1633.55,211.45 U1.12@1684.73,211.45
DAP_TXD: R11.1 U1.30 | length 347.9
  Top Layer w5: R11.1@1499.54,-115 1599,-115 1652,-168 1752.13,-168 1783.16,-136.98 U1.30@1783.16,-107.45
"DCMI_D0 / PC6": Camera1.10 U2.25 | length 1921.1
  Top Layer w5: v1(1047,527) 1019.16,527 1010.03,517.88 987.23,517.88 847.69,657.41 847.69,1401.68 1119.06,1673.05 Camera1.10@1119.06,1914.91 ; v1(1171.45,696.45) 1173.61,698.61 1211.93,698.61 1212.15,698.39 U2.25@1214.54,700.78
  Bottom Layer w5: v1(1047,527) 1046,528 1046,611 1131,696 1171,696 v1(1171.45,696.45)
"DCMI_D1 / PC7": Camera1.11 U2.29 | length 2071.8
  Top Layer w5: v1(1020,499.56) 976.56,499.56 827.2,648.92 827.2,1410.17 1098.57,1681.54 Camera1.11@1098.57,1913 ; U2.29@1214.54,740.15 1214.81,739.87 1258.75,739.87 v1(1259.02,739.6)
  Bottom Layer w5: v1(1020,499.56) 1020,597.73 1161.27,739 1258.42,739 v1(1259.02,739.6)
"DCMI_D2 / PG10": Camera1.12 U2.32 | length 2265.4
  Top Layer w5: Camera1.12@1078.89,1913 1078.89,1689.7 807.52,1418.33 807.52,640.77 967.04,481.25 1036.63,481.25 1068.37,513 v1(1125,513) ; v1(1362.73,753.48) 1367.77,753.48 1374.12,759.83 1401.64,759.83 1403.56,757.92 U2.32@1405.47,759.83
  Bottom Layer w5: v1(1125,513) 1149.16,513 1159.47,502.69 1231.69,502.69 1388.19,659.19 1388.19,693.81 1362.73,719.27 v1(1362.73,753.48)
"DCMI_D3 / PG11": Camera1.13 U2.34 | length 2419.9
  Top Layer w5: Camera1.13@1059.2,1913 1059.2,1697.85 787.83,1426.48 787.83,632.62 948.73,471.73 1049.73,471.73 1060,482 1088.48,482 1093.48,477 v1(1127,477) ; v1(1355,780) 1355.24,779.76 1405.23,779.76 U2.34@1405.47,779.52
  Bottom Layer w5: v1(1127,477) 1142.31,461.69 1210.48,461.69 1399,650.21 1399,788 1385,802 1358,802 1355,799 v1(1355,780)
"DCMI_D4 / PE4": Camera1.14 U2.49 | length 2580.8
  Top Layer w5: Camera1.14@1039.52,1913 1039.52,1706 768.15,1434.63 768.15,624.46 960.19,432.42 1255.02,432.42 1256.55,433.95 1266.9,433.95 1299.26,466.31 1299.26,466.99 1331.62,499.35 1331.62,551.68 1329,554.3 1329,604 1315,618 1315,763 1272,806 1272,918 1253,937 U2.49@1214.54,937
"DCMI_D5 / PD3": Camera1.15 U2.12 | length 2233.9
  Top Layer w5: Camera1.15@1019.83,1913 1019.83,1714.16 748.46,1442.79 748.46,616.31 941.35,423.42 1258.75,423.42 1260.27,424.95 1270.62,424.95 1335.62,489.95 1335.62,490.62 1340.62,495.62 1340.62,546.36 1357.24,562.98 U2.12@1405.47,562.98
"DCMI_D6 / PE5": Camera1.16 U2.51 | length 2721.7
  Top Layer w5: Camera1.16@1000.15,1913 1000.15,1722.31 728.78,1450.94 728.78,608.15 922.52,414.42 1262.47,414.42 1264,415.95 1274.35,415.95 1304.41,446.01 1325.01,446.01 v1(1356,477) ; U2.51@1214.54,956.68 1266.32,956.68 1281,942 1281,813 1324,770 1324,621.73 1358.93,586.79 v1(1358.93,584)
  Bottom Layer w5: v1(1356,477) 1356,562.19 1358.5,564.69 1358.5,583.57 v1(1358.93,584)
"DCMI_D7 / PE6": Camera1.17 U2.41 | length 2646.2
  Top Layer w5: Camera1.17@980.46,1913 980.46,1730.46 709.09,1459.09 709.09,600 904.09,405 975.2,405 995.2,385 1237,385 v1(1245.45,376.55) ; U2.41@1214.54,858.26 1243.74,858.26 1256,846 1256,809 1306,759 1306,614.27 1313.31,606.96 v1(1313.31,525)
  Bottom Layer w5: v1(1245.45,376.55) 1241.88,380.12 1241.88,393.48 1237,398.36 1237,426.03 1230.91,432.12 1230.91,463.01 1267.33,499.44 1276.54,499.44 1287.42,510.31 1291.62,510.31 1294.39,513.08 1297.92,513.08 1309.85,525 v1(1313.31,525)
"DCMI_HSYNC / PA4": Camera1.8 U3.47 | length 2284.8
  Top Layer w5: U3.47@-95.46,917.31 -94.03,918.75 -68.74,918.75 -51.49,936 v1(-31,936) ; v1(1157.63,1853.09) Camera1.8@1157.63,1913
  Bottom Layer w5: v1(-31,936) -31,962 7,1000 36,1000 46.13,1010.13 65.07,1010.13 68,1007.2 68,1000.68 128.68,940 174.27,940 207.52,906.75 865.25,906.75 957,998.51 957,1793 971,1807 1135,1807 1157.09,1829.09 1157.63,1829.09 v1(1157.63,1853.09)
"DCMI_PIXCLK / PA6": Camera1.19 U3.51 | length 2081
  Top Layer w5: U3.51@-95.46,956.68 -77.75,956.68 -62.04,972.38 -46.51,972.38 v1(-42.95,975.95) ; v1(941.09,1853.09) Camera1.19@941.09,1913
  Bottom Layer w5: v1(-42.95,975.95) -9,1009.9 -9,1023 7,1039 57,1039 77,1019 77,1004.41 131.41,950 177,950 209,918 854,918 941.09,1005.09 v1(941.09,1853.09)
"DCMI_VSYNC / PG9": Camera1.7 U2.26 | length 1999.5
  Top Layer w5: v1(1127.55,551.61) 1106.98,551.61 1106.22,550.85 1036.63,550.85 905.94,681.54 905.94,1377.56 1177.32,1648.93 Camera1.7@1177.32,1913 ; v1(1342.31,684) 1342.31,689.04 1351.78,698.5 1351.78,700.78 U2.26@1405.47,700.78
  Bottom Layer w5: v1(1127.55,551.61) 1129.54,549.62 1265.89,549.62 1335,618.73 1335,662.19 1338.75,665.94 1338.75,680.44 v1(1342.31,684)
GND: 3.3V.2 5V.2 *10.1 C1.2 C2.2 C3.1 C4.1 C5.1 C6.1 C7.1 C8.1 C9.1 Camera1.3 Camera1.9 Camera1.18 Camera1.20 JP1.16 JP2.1 JP2.2 JP3.1 LCD1.4 LCD1.5 LCD1.36 LCD2.3 LCD2.8 LCD2.10 LED1.2 LED2.2 P1.6 R4.1 U1.8 U1.23 U1.35 U1.47 U2.59 U2.60 U2.61 U2.62 U3.1 U3.2 U3.61 U3.62 U4.13 U4.14 U4.15 U4.16 U4.A1B12 U4.B1A12 U5.13 U5.14 U5.15 U5.16 U5.A1B12 U5.B1A12 U6.2 | length 2934.3
  Top Layer w12: JP2.1@-612,1730 JP2.2@-512,1730 ; v1(-225,1803) -224.09,1803.91 LCD2.10@-224.09,1881.49 ; LCD2.8@-184.72,1881.49 -184.63,1881.39 -184.63,1839.63 v1(-166,1821) ; U3.1@-95.47,464.56 -31.44,464.56 v1(-31,465) ; LCD2.3@-86.3,1881.49 -86.3,1819.3 v1(-76,1809) ; U3.61@0,377.95 v1(0,379) ; v1(25,465) 25.44,464.56 U3.2@95.47,464.56 ; v1(183,-486) 183,-485.6 v1@184.2,-484.41 ; LCD1.4@184.2,-401.24 v1@184.2,-484.41 ; LCD1.5@203.88,-401.24 203.88,-464.72 v1@184.2,-484.41 ; v1(553,1600) 556.57,1596.43 556.57,1550.13 P1.6@563.69,1543 ; LCD1.36@814.12,-401.24 814.12,-479.12 v1(815,-480) ; v1(863,1846) 896.63,1879.63 921.32,1879.63 921.41,1879.72 Camera1.20@921.41,1913 ; C9.1@893.73,-137.78 893.73,-135.81 v1(902.43,-127.11) 912.54,-117 v1(947.44,-117) ; v1(960,1999) 960.78,1998.22 Camera1.18@960.78,1913 ; U5.14@1055.85,-524 v1(1055.85,-446.64) U5.13@1055.85,-369.28 ; v1(1097.46,-142.54) C8.1@1100.68,-142.54 ; Camera1.9@1137.94,1913 1137.94,1983.94 v1(1138,1984) ; v1(1170,1124) 1197.9,1096.1 1197.9,1036.5 1198.98,1035.42 U2.59@1214.54,1035.42 ; Camera1.3@1256.06,1913 1256.06,1847.94 v1(1285,1819) ; U2.61@1310,377.95 v1(1310.95,377.95) ; v1(1310,1121) U2.62@1310,1122.05 ; U2.60@1405.47,1035.42 1406.05,1036 v1(1463,1036) ; U5.16@1459,-524 v1(1459,-446.64) U5.15@1459,-369.28 ; 3.3V.2@1489.4,1733 1521,1733 v1(1544,1756) 1544,1713.6 1491.4,1661 5V.2@1491.4,1656 ; v1(1502,215) 1513.76,203.24 1539.25,203.24 LED2.2@1550.78,191.71 ; v1(1538.58,-36.58) U1.23@1633.55,-36.58 ; v1(1568,297) 1570.11,294.89 LED1.2@1647.22,294.89 ; U4.14@1582.2,-526.36 v1(1582.2,-449) U4.13@1582.2,-371.63 ; v1(1763,155) 1763.47,155.47 U1.8@1763.47,211.45 ; C2.2@1772.69,364.25 1773.19,364.75 v1(1800.88,364.75) 1828.56,364.75 C1.2@1829.06,365.25 ; v1(1851.54,6.54) 1851.54,51.54 v1(1858,58) ; U1.35@1881.58,-107.45 1881.58,-136.79 1885.36,-140.57 1885.36,-143.56 1921.8,-180 v1(1966,-180) ; U1.47@1952.45,140.58 1981.79,140.58 1985.57,144.36 1988.56,144.36 2006,161.8 v1(2006,198) ; U4.16@1985.35,-526.36 v1(1985.35,-449) U4.15@1985.35,-371.64
  Layer 1 w12: v1@898.38,-127.11 v1(902.43,-127.11)
  Bottom Layer w12: C7.1@1737,58.46 v1(1738.46,58.46) ; v1(1851.54,6.54) 1860.31,-2.22 1885.17,-2.22 1929.03,-46.09 R4.1@1931,-46.09 ; C4.1@1952,339.54 v1(1952.54,339)
  other v1: 1658.35,-306.36 1910.32,-306.36 1132,-304 1383.97,-304 1658.35,-278.36 1910.32,-278.36 1132,-276 1383.97,-276 1658.35,-250.36 1910.32,-250.36 1132,-248 1383.97,-248 856,-171 883,-171 883,-146.54 857,-142 0,1122.05
"IIC2_SCL / PH4": R19.2 U3.52 | length 1745.9
  Top Layer w5: v1(60.3,952.66) 62.32,954.67 93.46,954.67 U3.52@95.47,956.68 113.19,956.68 139.5,983 v1(141,983) ; v1(166.46,896.46) 168.71,896.46 179.17,886 182,886 197,871 197,828 210,815 329,815 808,336 808,-190 856.74,-238.74 867.42,-238.74 871.23,-242.54 871.23,-253.23 877.91,-259.91 R19.2@903,-259.91
  Layer 1 w5: v1(141,983) 167,957 167,897 v1(166.46,896.46)
"IIC2_SDA / PH5": R20.2 U3.46 | length 1714.3
  Top Layer w5: U3.46@95.47,897.63 137.41,897.63 159.78,920 184,920 210,894 210,828 334.38,828 821,341.38 821,-188 860,-227 928.12,-227 961.03,-259.91 R20.2@963,-259.91
"IIC_SCLK / PG2": Camera1.4 U2.9 | length 1646.9
  Top Layer w5: U2.9@1214.53,543.3 1181.91,543.3 1175.58,549.62 1164.06,549.62 1151.37,562.31 1151.37,578.91 1141,589.27 1141,590.7 1131.39,600.31 1070.69,600.31 965,706 965,1353.09 1236.37,1624.46 Camera1.4@1236.37,1913
"IIC_SDA / PG3": Camera1.5 JP1.8 U3.8 | length 3625.1
  Top Layer w5: v1(-23.31,895) -20,891.69 -20,860 3.69,836.31 3.69,729.21 6.31,726.58 6.31,558.69 41.39,523.61 U3.8@95.47,523.61 ; v1(1216.69,1853.09) Camera1.5@1216.69,1913
  Bottom Layer w5: v1(-23.31,895) -7,911.31 -7,940 13,960 37.37,960 48.27,970.9 58.69,970.9 58.76,970.97 80.57,970.97 120.54,931 170.54,931 203.98,897.56 874.44,897.56 970,993.12 970,1788 978,1796 1177.32,1796 ; v1(1216.69,1853.09) 1216.69,1829.09 1183.59,1796 1177.32,1796 ; JP1.8@1942,1424 1890,1476 1746,1476 1450,1772 1201.32,1772 1177.32,1796
KEY_DOWN: *10.6 U3.35 | length 1630.1
  Top Layer w5: U3.35@-95.46,799.2 -138.74,799.2 -216,721.94 -216,-144.76 -90.76,-270 0,-270 33,-303 33,-433 -26.61,-492.61 *10.6@-26.61,-574.67
KEY_LEFT: *10.2 U3.41 | length 1455.3
  Top Layer w5: *10.2@-440,-429 -261.69,-250.69 -261.69,735.31 -138.74,858.26 U3.41@-95.46,858.26
KEY_PUSH: *10.3 U3.25 | length 1991.9
  Top Layer w5: U3.25@-95.46,700.78 -199.22,700.78 -207,693 -207,-129 -76,-260 2.73,-260 77,-334.27 v1(77,-390)
  Bottom Layer w5: *10.3@-440,-574.67 -360.26,-494.93 35.07,-494.93 77,-453 v1(77,-390)
KEY_RIGHT: *10.5 U3.39 | length 1482.4
  Top Layer w5: U3.39@-95.46,838.57 -138.74,838.57 -242.37,734.94 -242.37,-280.24 -123.61,-399 -56.61,-399 *10.5@-26.61,-429
KEY_UP: *10.4 U3.37 | length 1338.1
  Top Layer w5: U3.37@-95.46,818.89 -138.74,818.89 -225,732.62 -225,-187.38 -123.61,-288.76 -56.61,-288.76 *10.4@-26.61,-318.76
"LCD_B0 / PJ12": LCD1.12 U2.16 | length 2475.3
  Top Layer w5: v1(325.8,-324) 341.68,-339.87 LCD1.12@341.68,-401.24 ; U2.16@1405.47,602.35 v1@1447.9,602.35
  Bottom Layer w5: v1(325.8,-324) 806.57,156.77 806.57,647.45 984.56,825.44 996.08,825.44 1097,926.35 1323.63,926.35 1336.46,913.53 1341.19,913.53 1357.08,897.63 1408.37,897.63 1423,883 1469,883 1550,802 1550,750 1517,717 1517,626 1492.32,601.31 v1(1448.94,601.31)
"LCD_B1 / PJ13": LCD1.16 U2.31 | length 1779.9
  Top Layer w5: LCD1.16@420.42,-401.24 420.42,-339.87 v1(436.29,-324) ; v1(1090.53,819.01) 1064,792.48 1064,728 1073.5,718.5 1076.4,718.5 1085.9,709 1145.98,709 1196.81,759.83 U2.31@1214.53,759.83
  Bottom Layer w5: v1(436.29,-324) 885.32,125.02 885.32,614.83 1089.5,819.01 v1(1090.53,819.01)
"LCD_B2 / PJ14": LCD1.19 U2.33 | length 1545.6
  Top Layer w5: LCD1.19@479.47,-401.24 479.47,-352.53 488.9,-352.53 517.43,-324 v1(519.16,-324) ; v1(1097,733) 1150.3,733 1196.82,779.52 U2.33@1214.54,779.52
  Bottom Layer w5: v1(519.16,-324) 935,91.84 935,591.79 1076.21,733 v1(1097,733)
"LCD_B3 / PJ15": LCD1.18 U2.24 | length 1791.5
  Top Layer w5: LCD1.18@459.79,-401.24 459.79,-352.53 461.28,-352.53 489.81,-324 v1(491.54,-324) ; v1(1369.88,682.21) 1370.44,681.65 1404.91,681.65 U2.24@1405.47,681.09
  Bottom Layer w5: v1(491.54,-324) 924.69,109.15 924.69,598.52 1097.47,771.31 1293.58,771.31 1366.31,698.58 1366.31,685.78 v1(1369.88,682.21)
"LCD_B4 / PK3": LCD1.17 U2.42 | length 1893.6
  Top Layer w5: LCD1.17@440.1,-401.24 440.1,-347.81 v1(463.91,-324) ; U2.42@1405.47,858.26 v1(1449,858.31)
  Bottom Layer w5: v1(463.91,-324) 905,117.09 905,606.68 1079.01,780.69 1295.69,780.69 1341,826 1419,826 1449,856 v1(1449,858.31)
"LCD_B5 / PK4": LCD1.15 U2.40 | length 1851.3
  Top Layer w5: LCD1.15@400.73,-401.24 400.73,-331.94 v1(408.67,-324) ; v1(1322,837) 1403.9,837 U2.40@1405.47,838.57
  Bottom Layer w5: v1(408.67,-324) 865.63,132.96 865.63,622.99 1086.13,843.49 1310.47,843.49 1316.96,837 v1(1322,837)
"LCD_B6 / PK5": LCD1.14 U2.38 | length 1949.6
  Top Layer w5: LCD1.14@381.05,-401.24 v1(381.05,-324) ; v1(1299.31,871) 1297,868.69 1297,820.93 1299.93,818 1404.59,818 U2.38@1405.47,818.89
  Bottom Layer w5: v1(381.05,-324) 845.94,140.9 845.94,631.14 1085.92,871.11 1134.89,871.11 1147.74,858.26 1201,858.26 1213.74,871 v1(1299.31,871) v1@1299.2,871.11
"LCD_B7 / PK6": LCD1.13 U2.46 | length 1944
  Top Layer w5: v1(353.43,-324) 361.36,-331.94 LCD1.13@361.36,-401.24 ; v1(1333.6,895.22) 1333.69,895.13 1352.91,895.13 1355.41,897.63 U2.46@1405.47,897.63
  Bottom Layer w5: v1(353.43,-324) 826.26,148.83 826.26,639.29 998.48,811.52 1009.78,811.52 1115.27,917 1310.1,917 1331.89,895.22 v1(1333.6,895.22)
"LCD_BL / PH6": LCD1.3 LCD2.7 U3.27 | length 3398.9
  Top Layer w5: LCD2.7@-165.04,1881.49 -165.04,1909.05 -172.32,1916.33 -172.32,1917.65 -181.67,1927 -235,1927 -243.31,1918.69 -243.31,1780.31 -179,1716 -179,1387 17,1191 17,1162.97 19.93,1160.04 46,1160.04 49.81,1156.24 49.81,1087.86 7.02,1045.08 7.02,896.84 9.4,894.46 9.4,853.02 12.69,849.73 12.69,747.72 38.36,722.06 v1(42.43,722.06) ; U3.27@-95.46,720.46 -94.73,719.73 -12.73,719.73 v1(-12,719) ; LCD1.3@164.51,-401.24 164.51,-322.49 191,-296 510,-296 522,-284 522,292 338,476 v1(180,476)
  Bottom Layer w5: v1(-12,719) -10.96,717.96 v1@42.45,717.96 ; v1(42.43,722.06) v1@42.43,717.96 ; v1(180,476) 133.69,522.31 133.69,666.31 81,719 45.57,719 43.49,716.92 v1@42.45,717.96
"LCD_CLK / PI14": LCD1.37 U2.57 | length 1841.4
  Top Layer w5: v1(821.45,-352.03) 821.45,-357.07 826.52,-362.15 826.52,-366.41 833.8,-373.69 LCD1.37@833.8,-401.24 ; v1(1069.05,699.95) 1048,721 1048,893 1014,927 1014,1001 1048,1035 1109,1035 1129,1015 1213.8,1015 U2.57@1214.54,1015.74
  Layer 1 w5: v1@821,-351.58 v1(821.45,-352.03)
  Bottom Layer w5: v1(821.45,-352.03) 719,-249.58 719,-141.27 944,83.73 944,574.9 v1(1069.05,699.95)
LCD_DC/PG12: LCD2.6 U2.36 | length 3411.2
  Top Layer w5: LCD2.6@-145.35,1881.49 -145.35,1806.37 -146,1805.73 -146,1420.27 28.59,1245.69 269.73,1245.69 602.3,913.11 602.3,585.54 923.84,264 1445.27,264 1585.31,404.04 1585.31,495.69 1531,550 1531,707.62 1439.42,799.2 U2.36@1405.47,799.2
"LCD_DE / PK7": LCD1.9 U2.47 | length 2018.1
  Top Layer w5: v1(242.94,-324) 244.66,-324 273.19,-352.53 282.62,-352.53 LCD1.9@282.62,-401.24 ; v1(1097,1009.22) 1075,987.22 1075,946 1103.69,917.31 U2.47@1214.54,917.31
  Bottom Layer w5: v1(242.94,-324) 747.52,180.58 747.52,671.91 942.81,867.19 954.97,867.19 v1(1097,1009.22)
"LCD_G0 / PJ7": LCD1.24 U3.24 | length 1444.1
  Top Layer w5: U3.24@95.47,681.09 113.19,681.09 138.28,656 160.62,656 v1(161,655.62) ; v1(235.37,563.63) 316.68,563.63 322.03,568.98 398.29,568.98 577.9,389.38 LCD1.24@577.9,-401.24
  Bottom Layer w5: v1(161,655.62) 161,652.27 152.75,644.02 152.75,597.45 179.19,571 213.56,571 217.37,567.2 231.81,567.2 v1(235.37,563.63)